# EAGLE board Panel_template (EAGLE 9.6.2)

No outline drawn. Coordinates in mm, seen from the top.
Copper layers (1+2*15+16): Top 0.035mm / dielectric 0.12mm / Route2 0.035mm / dielectric 1.2mm / Route15 0.035mm / dielectric 0.12mm / Bottom 0.035mm
Design rules "design rules": minimum track width 0.15mm, minimum drill 0.2mm, track to track 0.15mm, track to pad 0.15mm, pad to pad 0.15mm, via to via 0.15mm, smd to smd 0.15mm, copper to edge 0.3mm, drill to drill 0.2mm, minimum pad ring 0.125mm, minimum via ring 0.125mm, stop-mask expansion 1mil, vias tented up to drill 0.31mm, thermal gap 8mil
Holes 0.5 mm at 36.5,69.75 38.5,69.75 37.5,69.75 39.5,69.75 40.5,69.75 41.5,69.75 43.5,69.75 42.5,69.75 44.5,69.75 45.5,69.75 45.5,12.25 43.5,12.25 44.5,12.25 42.5,12.25 41.5,12.25 40.5,12.25 38.5,12.25 39.5,12.25 37.5,12.25 36.5,12.25 12.25,36.5 12.25,38.5 12.25,37.5 12.25,39.5 12.25,40.5 12.25,41.5 12.25,43.5 12.25,42.5 12.25,44.5 12.25,45.5 69.75,45.5 69.75,43.5 69.75,44.5 69.75,42.5 69.75,41.5 69.75,40.5 69.75,38.5 69.75,39.5 69.75,37.5 69.75,36.5 96.5,69.75 98.5,69.75 97.5,69.75 99.5,69.75 100.5,69.75 101.5,69.75 103.5,69.75 102.5,69.75 104.5,69.75 105.5,69.75 105.5,12.25 103.5,12.25 104.5,12.25 102.5,12.25 101.5,12.25 100.5,12.25 98.5,12.25 99.5,12.25 97.5,12.25 96.5,12.25 72.25,36.5 72.25,38.5 72.25,37.5 72.25,39.5 72.25,40.5 72.25,41.5 72.25,43.5 72.25,42.5 72.25,44.5 72.25,45.5 129.75,45.5 129.75,43.5 129.75,44.5 129.75,42.5 129.75,41.5 129.75,40.5 129.75,38.5 129.75,39.5 129.75,37.5 129.75,36.5 156.5,69.75 158.5,69.75 157.5,69.75 159.5,69.75 160.5,69.75 161.5,69.75 163.5,69.75 162.5,69.75 164.5,69.75 165.5,69.75 165.5,12.25 163.5,12.25 164.5,12.25 162.5,12.25 161.5,12.25 160.5,12.25 158.5,12.25 159.5,12.25 157.5,12.25 156.5,12.25 132.25,36.5 132.25,38.5 132.25,37.5 132.25,39.5 132.25,40.5 132.25,41.5 132.25,43.5 132.25,42.5 132.25,44.5 132.25,45.5 189.75,45.5 189.75,43.5 189.75,44.5 189.75,42.5 189.75,41.5 189.75,40.5 189.75,38.5 189.75,39.5 189.75,37.5 189.75,36.5 36.5,129.75 38.5,129.75 37.5,129.75 39.5,129.75 40.5,129.75 41.5,129.75 43.5,129.75 42.5,129.75 44.5,129.75 45.5,129.75 45.5,72.25 43.5,72.25 44.5,72.25 42.5,72.25 41.5,72.25 40.5,72.25 38.5,72.25 39.5,72.25 37.5,72.25 36.5,72.25 12.25,96.5 12.25,98.5 12.25,97.5 12.25,99.5 12.25,100.5 12.25,101.5 12.25,103.5 12.25,102.5 12.25,104.5 12.25,105.5 69.75,105.5 69.75,103.5 69.75,104.5 69.75,102.5 69.75,101.5 69.75,100.5 69.75,98.5 69.75,99.5 69.75,97.5 69.75,96.5 96.5,129.75 98.5,129.75 97.5,129.75 99.5,129.75 100.5,129.75 101.5,129.75 103.5,129.75 102.5,129.75 104.5,129.75 105.5,129.75 105.5,72.25 103.5,72.25 104.5,72.25 102.5,72.25 101.5,72.25 100.5,72.25 98.5,72.25 99.5,72.25 97.5,72.25 96.5,72.25 72.25,96.5 72.25,98.5 72.25,97.5 72.25,99.5 72.25,100.5 72.25,101.5 72.25,103.5 72.25,102.5 72.25,104.5 72.25,105.5 129.75,105.5 129.75,103.5 129.75,104.5 129.75,102.5 129.75,101.5 129.75,100.5 129.75,98.5 129.75,99.5 129.75,97.5 129.75,96.5 156.5,129.75 158.5,129.75 157.5,129.75 159.5,129.75 160.5,129.75 161.5,129.75 163.5,129.75 162.5,129.75 164.5,129.75 165.5,129.75 165.5,72.25 163.5,72.25 164.5,72.25 162.5,72.25 161.5,72.25 160.5,72.25 158.5,72.25 159.5,72.25 157.5,72.25 156.5,72.25 132.25,96.5 132.25,98.5 132.25,97.5 132.25,99.5 132.25,100.5 132.25,101.5 132.25,103.5 132.25,102.5 132.25,104.5 132.25,105.5 189.75,105.5 189.75,103.5 189.75,104.5 189.75,102.5 189.75,101.5 189.75,100.5 189.75,98.5 189.75,99.5 189.75,97.5 189.75,96.5 10.25,96.5 10.25,98.5 10.25,97.5 10.25,99.5 10.25,100.5 10.25,101.5 10.25,103.5 10.25,102.5 10.25,104.5 10.25,105.5 10.25,36.5 10.25,38.5 10.25,37.5 10.25,39.5 10.25,40.5 10.25,41.5 10.25,43.5 10.25,42.5 10.25,44.5 10.25,45.5 191.75,45.5 191.75,43.5 191.75,44.5 191.75,42.5 191.75,41.5 191.75,40.5 191.75,38.5 191.75,39.5 191.75,37.5 191.75,36.5 191.75,105.5 191.75,103.5 191.75,104.5 191.75,102.5 191.75,101.5 191.75,100.5 191.75,98.5 191.75,99.5 191.75,97.5 191.75,96.5 156.5,131.75 158.5,131.75 157.5,131.75 159.5,131.75 160.5,131.75 161.5,131.75 163.5,131.75 162.5,131.75 164.5,131.75 165.5,131.75 96.5,131.75 98.5,131.75 97.5,131.75 99.5,131.75 100.5,131.75 101.5,131.75 103.5,131.75 102.5,131.75 104.5,131.75 105.5,131.75 36.5,131.75 38.5,131.75 37.5,131.75 39.5,131.75 40.5,131.75 41.5,131.75 43.5,131.75 42.5,131.75 44.5,131.75 45.5,131.75 45.5,10.25 43.5,10.25 44.5,10.25 42.5,10.25 41.5,10.25 40.5,10.25 38.5,10.25 39.5,10.25 37.5,10.25 36.5,10.25 105.5,10.25 103.5,10.25 104.5,10.25 102.5,10.25 101.5,10.25 100.5,10.25 98.5,10.25 99.5,10.25 97.5,10.25 96.5,10.25 165.5,10.25 163.5,10.25 164.5,10.25 162.5,10.25 161.5,10.25 160.5,10.25 158.5,10.25 159.5,10.25 157.5,10.25 156.5,10.25
Milling: 342 lines

## Footprints (pad centres in the part's own frame; a part is rotated, then mirrored left to right if it is on the bottom)
FIDUCIA-MOUNT = smd 1.016 x 1.016: P$1 0,0

## Placement (x,y rotation side)
U$1  FIDUCIALMOUNT  [FIDUCIA-MOUNT]  5,5 0 bottom
U$2  FIDUCIALMOUNT  [FIDUCIA-MOUNT]  197,5 0 top
U$3  FIDUCIALMOUNT  [FIDUCIA-MOUNT]  197,5 0 bottom
U$4  FIDUCIALMOUNT  [FIDUCIA-MOUNT]  197,137 0 top
U$5  FIDUCIALMOUNT  [FIDUCIA-MOUNT]  197,137 0 bottom
U$43  FIDUCIALMOUNT  [FIDUCIA-MOUNT]  5,5 0 top

## Library data of the parts
U$1-U$5 U$43 = misc; BOM: EXCLUDE